# EAGLE board PCM2706C_TDA1543 (EAGLE 9.6.2)
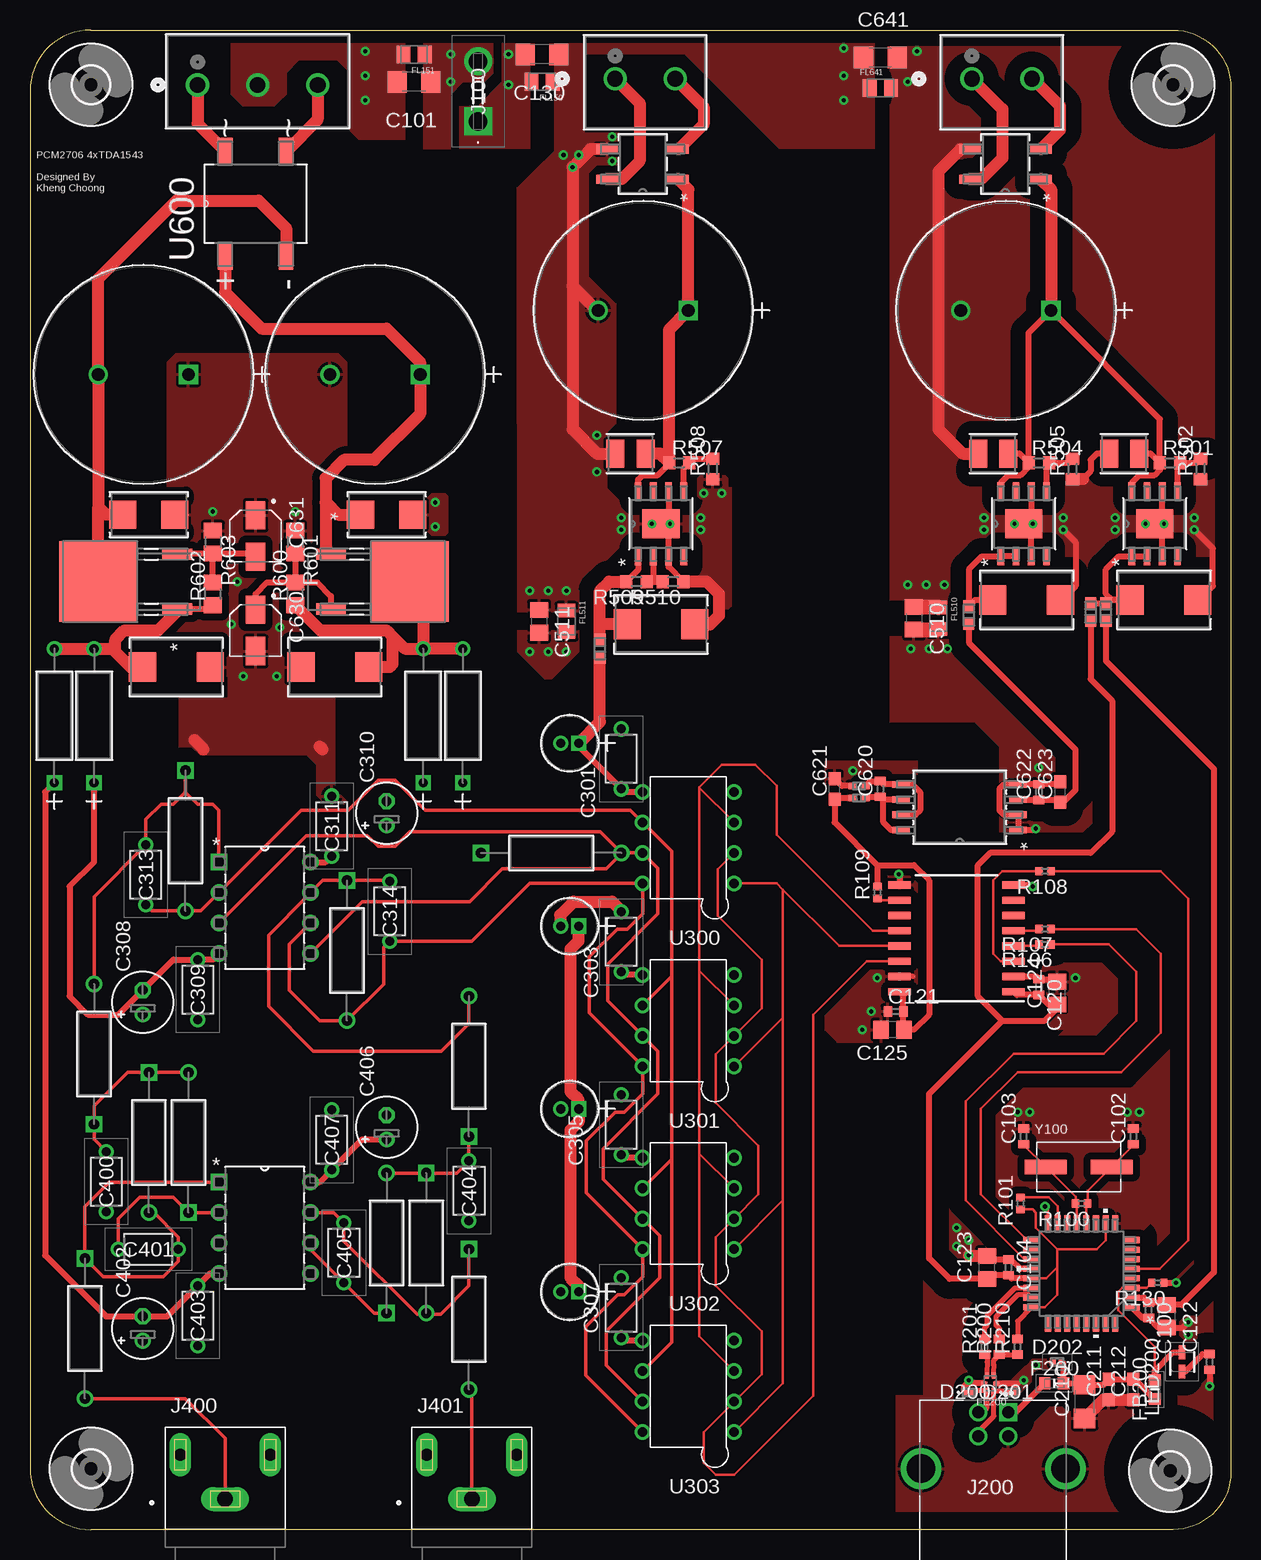
[diagram p0: board, top side]
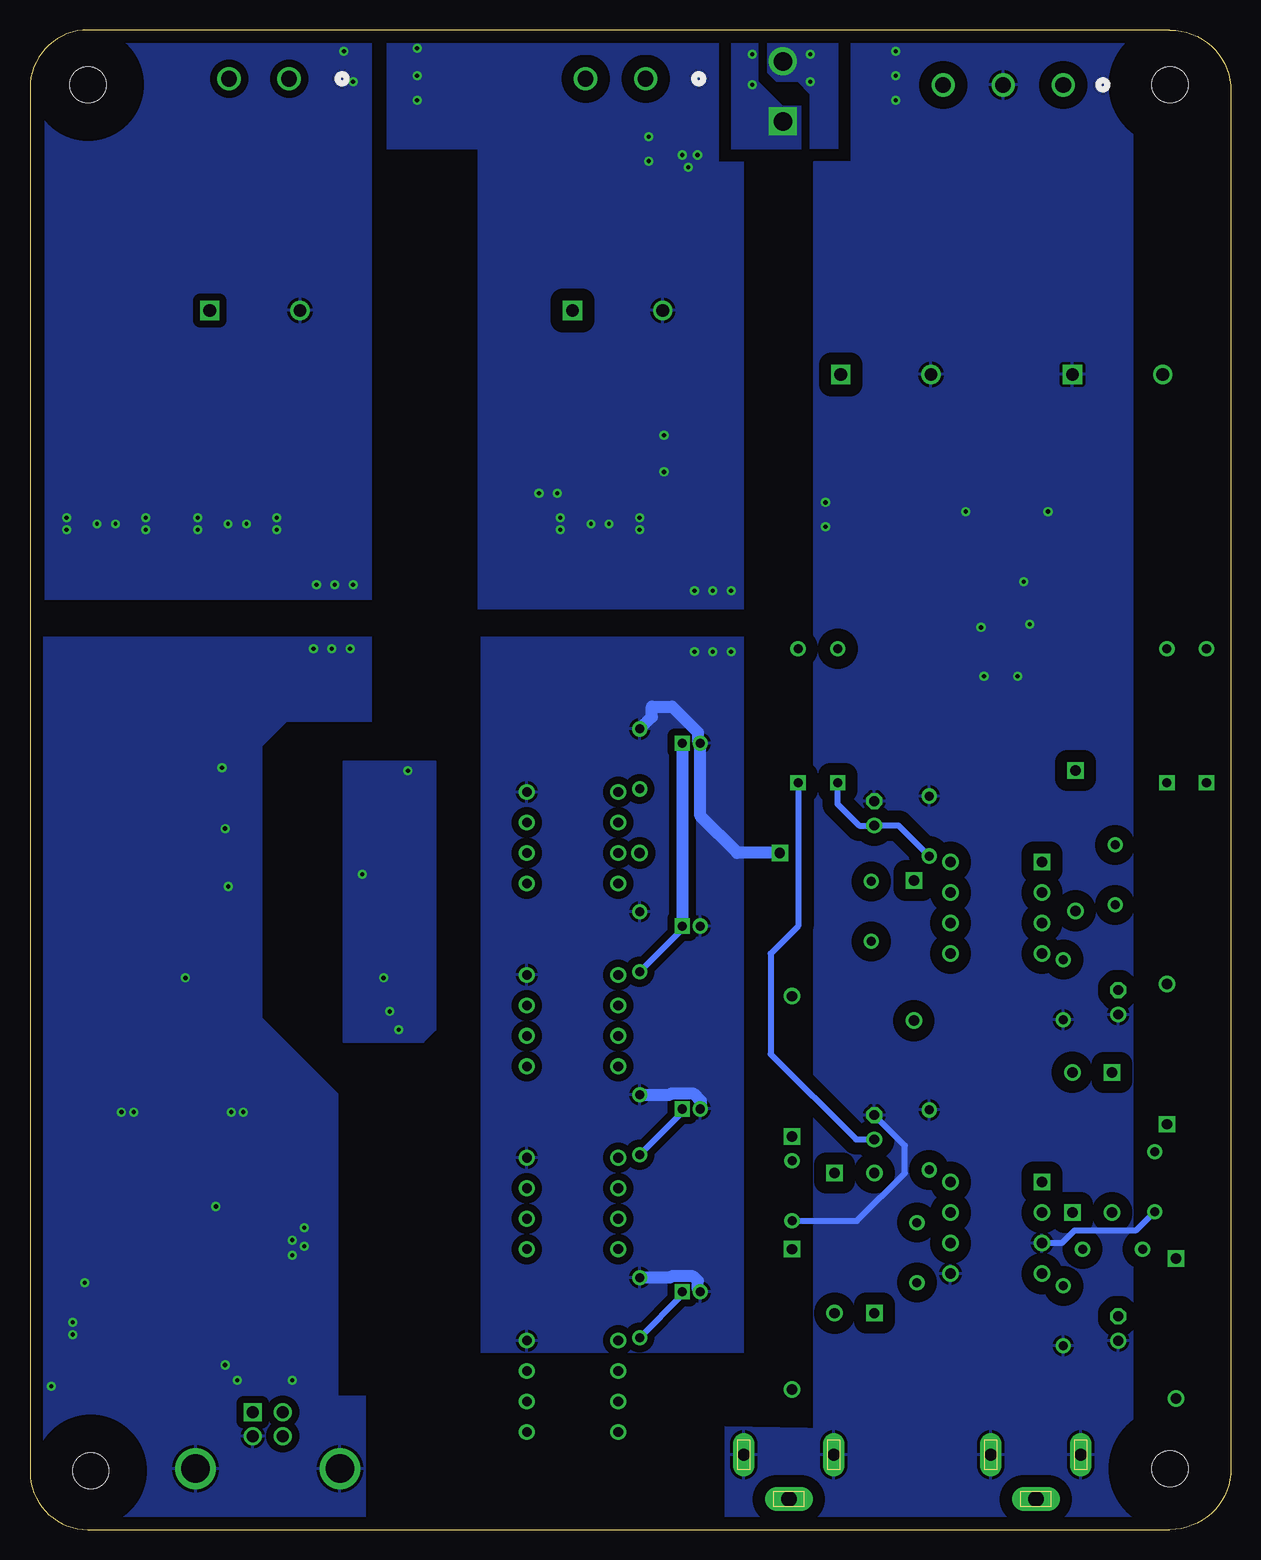
[diagram p1: board, bottom side, seen from below]

Size 100.08 x 124.97 mm. Coordinates in mm from the lower left corner, seen from the top.
Outline: 0,119.89 0,5.08 arc90 5.08,0 95.25,0 arc90 100.08,4.83 100.08,120.14 arc90 95.25,124.97 5.08,124.97 arc90 0,119.89
Copper layers (1*16): Top 0.035mm / dielectric 1.5mm / Bottom 0.035mm
Design rules "default *": minimum track width 6mil, minimum drill 0.35mm, track to track 6mil, track to pad 6mil, pad to pad 6mil, via to via 6mil, smd to smd 6mil, copper to edge 40mil, drill to drill 6mil, minimum pad ring 10mil, minimum via ring 8mil, stop-mask expansion 4mil, vias tented up to drill 13mil, thermal gap 10mil
Net classes: 1 Diff_Pair: width 0.406 mm; 2 Power: width 0.508 mm; 3 Digital: width 0.203 mm, clearance 0.61 mm; 4 Analog: width 0.305 mm, clearance 0.914 mm; 5 OPAMP power: width 0.762 mm

## Footprints (pad centres in the part's own frame; a part is rotated, then mirrored left to right if it is on the bottom)
C0402 = smd 0.7 x 0.9: 1 -0.65,0; 2 0.65,0
C1206 = smd 1.6 x 1.8: 1 -1.4,0; 2 1.4,0
C0805 = smd 1.3 x 1.5: 1 -0.95,0; 2 0.95,0
C0603 = smd 1.1 x 1: 1 -0.85,0; 2 0.85,0
CAP_PAN_4X7_PAN = drill 0.762 pad 1.27 square: 1 0,0 | drill 0.762 pad 1.27: 2 1.499,0
K104K15X7RF5TH5 = drill 0.75 pad 1.2: 1 0,0; 2 5,0
E2-5 = drill 0.813 pad 1.27: + -1.016,0 | drill 0.813 pad 1.27 octagon: - 1.016,0
PCAP_18X355_PAN = drill 1.067 pad 1.524 square: 1 0,0 | drill 1.067 pad 1.524: 2 7.518,0
CAP_293D-B_VSS = smd 1.498 x 2.311: 1 -1.258,0; 2 1.258,0
CAP_7343-43_TR3 = smd 2.261 x 2.489: 1 -2.819,0; 2 2.819,0
CAP_293D-C_VSS = smd 2.261 x 2.311: 1 -2.172,0; 2 2.172,0
CAPAE430X550N = smd 2.36 x 1.62: 1 -1.725,0; 2 1.725,0
X2DFN2_1.0X0.6_CASE_714AB_ISSU = smd 0.47 x 0.6: 1 -0.365,0; 2 0.365,0
ESD5581N2T5G = smd 0.47 x 0.6: 1 -0.365,0; 2 0.365,0
FUSC1608X75N = smd 0.95 x 1.02: 1 -0.785,0; 2 0.785,0
BEADC1608X100N = smd 0.95 x 1: 1 -0.8,0; 2 0.8,0
BEADC2012X105N = smd 1.14 x 1.47: 1 -0.89,0; 2 0.89,0
FIL_LCFE121002A350TG = smd 0.3 x 0.5: 1 -0.275,0.625; 2 0.275,0.625; 3 0.275,-0.625; 4 -0.275,-0.625 | smd 0.5 x 0.3: 5 -0.49,0; 6 0.49,0
3,0 = hole 3: 0,0
23765952 = drill 1.55 pad 2.325 square: 1 0,0 | drill 1.55 pad 2.325: 2 5,0
AMPHENOL_61729-1011BLF = drill 1 square: 1 1.25,4.71 | drill 1: 2 -1.25,4.71; 3 -1.25,2.71; 4 1.25,2.71 | drill 2.38: S1 -6.02,0; S2 6.02,0
SWITCHCRAFT_PJRAN1X1U01X = drill 1.3 pad 2 long: 1 0,0 | drill 1 pad 1.8 long: 2 -3.75,3.7; 3 3.75,3.7
CONN2_710002_WRE = drill 1.295 pad 1.803: 1 0,0; 2 5.004,0
CONN3_WR-TBL-1377_WRE = drill 1.295 pad 1.803: 1 0,0; 2 5.004,0; 3 10.008,0
IND_BLM18_0603_MUR = smd 0.965 x 0.94: 1 -0.749,0; 2 0.749,0
IND_BOURNS_78F = drill 0.762 pad 1.27 square: 1 0,0 | drill 0.762 pad 1.27: 2 11.176,0
IND_BLM15_0402_MUR = smd 0.711 x 0.559: 1 -0.521,0; 2 0.521,0
LEDM1620X150N = smd 1.15 x 0.55: 1 -0.8,0; 2 0.8,0
R0402 = smd 0.6 x 0.7: 1 -0.5,0; 2 0.5,0
R0402' = smd 0.7 x 0.9: 1 -0.65,0; 2 0.65,0
YAG_MF25_YAG = drill 0.864 pad 1.372 square: 1 0,0 | drill 0.864 pad 1.372: 2 11.684,0
R0603 = smd 1 x 1.1: 1 -0.85,0; 2 0.85,0
R0805 = smd 1.3 x 1.5: 1 -0.95,0; 2 0.95,0
PJT32_TEX = smd 1.346 x 0.508: 1 -4.178,2.8; 2 -4.178,2; 3 -4.178,1.2; 4 -4.178,0.4; 5 -4.178,-0.4; 6 -4.178,-1.2; 7 -4.178,-2; 8 -4.178,-2.8; 17 4.178,-2.8; 18 4.178,-2; 19 4.178,-1.2; 20 4.178,-0.4; 21 4.178,0.4; 22 4.178,1.2; 23 4.178,2; 24 4.178,2.8 | smd 0.508 x 1.346: 9 -2.8,-4.178; 10 -2,-4.178; 11 -1.2,-4.178; 12 -0.4,-4.178; 13 0.4,-4.178; 14 1.2,-4.178; 15 2,-4.178; 16 2.8,-4.178; 25 2.8,4.178; 26 2,4.178; 27 1.2,4.178; 28 0.4,4.178; 29 -0.4,4.178; 30 -1.2,4.178; 31 -2,4.178; 32 -2.8,4.178
DW0016B_N = smd 1.9 x 0.6: 1 -4.75,4.445; 2 -4.75,3.175; 3 -4.75,1.905; 4 -4.75,0.635; 5 -4.75,-0.635; 6 -4.75,-1.905; 7 -4.75,-3.175; 8 -4.75,-4.445; 9 4.75,-4.445; 10 4.75,-3.175; 11 4.75,-1.905; 12 4.75,-0.635; 13 4.75,0.635; 14 4.75,1.905; 15 4.75,3.175; 16 4.75,4.445
DIP-8(300MIL)(2.54MM) = drill 0.8: 1 -3.81,-3.81; 2 -1.27,-3.81; 3 1.27,-3.81; 4 3.81,-3.81; 5 3.81,3.81; 6 1.27,3.81; 7 -1.27,3.81; 8 -3.81,3.81
P8 = drill 0.864 pad 1.372 square: 1 -7.62,7.62 | drill 0.864 pad 1.372: 2 -7.62,5.08; 3 -7.62,2.54; 4 -7.62,0; 5 0,0; 6 0,2.54; 7 0,5.08; 8 0,7.62
TO-269AA_3P8X4P75_DIO = smd 1.803 x 0.762: 1 -2.959,1.25; 2 -2.959,-1.25; 3 2.959,-1.25; 4 2.959,1.25
RD_8_2_ADI = smd 1.46 x 0.559: 1 -2.724,1.905; 2 -2.724,0.635; 3 -2.724,-0.635; 4 -2.724,-1.905; 5 2.724,-1.905; 6 2.724,-0.635; 7 2.724,0.635; 8 2.724,1.905 | smd 2.413 x 3.099: EPAD 0,0
SOT508P985X260-4N = smd 2.235 x 1.245: 1 -4.394,2.54; 2 -4.394,-2.54; 3 4.394,-2.54; 4 4.394,2.54
KVU3 = smd 0.94 x 2.489: 1 -2.286,-6.413; 3 2.286,-6.413 | smd 6.706 x 6.528: 2 0,0.152
RI_8_1_ADI = smd 1.461 x 0.561: 1 -4.88,1.905; 2 -4.88,0.635; 3 -4.88,-0.635; 4 -4.88,-1.905; 5 4.88,-1.905; 6 4.88,-0.635; 7 4.88,0.635; 8 4.88,1.905
XTAL_ECS-120-20-3X-TR = smd 3.5 x 1.2: 1 -2.75,0; 2 2.75,0

## Placement (x,y rotation side)
C100  CC0402KRX7R8BB104  [C0402]  93.22,18.29 270 top
C101  [C1206]  32,120.65 180 top
C102  CC0402FRNPO8BN270  [C0402]  91.95,32.77 90 top
C103  CC0402FRNPO8BN270  [C0402]  82.8,32.77 90 top
C104  CC0402KRX7R8BB104  [C0402]  81.53,21.84 90 top
C120  CC0402KRX7R8BB104  [C0402]  84.07,45.21 270 top
C121  CC0402KRX7R8BB104  [C0402]  72.14,43.18 0 top
C122  10uF  [C0805]  94.74,17.78 270 top
C123  10uF  [C0805]  79.76,21.84 90 top
C124  10uF  [C0805]  85.6,44.7 90 top
C125  10uF  [C0805]  71.88,41.66 180 top
C130  [C1206]  42.67,122.94 180 top
C210  0.01uF  [C1206]  87.88,10.67 90 top
C211  0.1uF  [C0603]  89.92,11.68 90 top
C212  10uF  [C0603]  91.95,11.68 90 top
C300  EEAGA1C100H  [CAP_PAN_4X7_PAN]  45.72,35.05 180 top
C301  K104K15X7RF5TH5  [K104K15X7RF5TH5]  49.28,61.72 90 top
C302  EEAGA1C100H  [CAP_PAN_4X7_PAN]  45.72,50.29 180 top
C303  K104K15X7RF5TH5  [K104K15X7RF5TH5]  49.28,46.48 90 top
C304  EEAGA1C100H  [CAP_PAN_4X7_PAN]  45.72,65.53 180 top
C305  K104K15X7RF5TH5  [K104K15X7RF5TH5]  49.28,31.24 90 top
C306  EEAGA1C100H  [CAP_PAN_4X7_PAN]  45.72,19.81 180 top
C307  K104K15X7RF5TH5  [K104K15X7RF5TH5]  49.28,16 90 top
C308  860020572003  [E2-5]  9.4,43.94 90 top
C309  K104K15X7RF5TH5  [K104K15X7RF5TH5]  13.97,47.5 270 top
C310  860020572003  [E2-5]  29.72,59.69 90 top
C311  K104K15X7RF5TH5  [K104K15X7RF5TH5]  25.15,56.13 90 top
C313  K104K15X7RF5TH5  [K104K15X7RF5TH5]  9.65,52.07 90 top
C314  K104K15X7RF5TH5  [K104K15X7RF5TH5]  29.97,49.02 90 top
C400  K104K15X7RF5TH5  [K104K15X7RF5TH5]  6.35,31.5 270 top
C401  K104K15X7RF5TH5  [K104K15X7RF5TH5]  7.37,23.37 0 top
C402  860020572003  [E2-5]  9.4,16.76 90 top
C403  K104K15X7RF5TH5  [K104K15X7RF5TH5]  13.97,20.32 270 top
C404  K104K15X7RF5TH5  [K104K15X7RF5TH5]  36.58,30.73 270 top
C405  K104K15X7RF5TH5  [K104K15X7RF5TH5]  26.16,20.57 90 top
C406  860020572003  [E2-5]  29.72,33.53 90 top
C407  K104K15X7RF5TH5  [K104K15X7RF5TH5]  25.15,29.97 90 top
C500  ECA-1VM472  [PCAP_18X355_PAN]  85.09,101.6 180 top
C501  293D225X0035B2TE3  [CAP_293D-B_VSS]  91.19,89.66 180 top
C503  TR3E226K035C0200  [CAP_7343-43_TR3]  94.49,77.47 0 top
C504  293D225X0035B2TE3  [CAP_293D-B_VSS]  80.26,89.66 180 top
C505  TR3E226K035C0200  [CAP_7343-43_TR3]  83.06,77.47 0 top
C506  ECA-1VM472  [PCAP_18X355_PAN]  54.86,101.6 180 top
C507  293D225X0035B2TE3  [CAP_293D-B_VSS]  50.04,89.66 180 top
C508  TR3E226K035C0200  [CAP_7343-43_TR3]  52.58,75.44 0 top
C510  [C0805]  73.66,75.95 270 top
C511  [C0805]  42.42,75.69 270 top
C600  ECA-1HM332  [PCAP_18X355_PAN]  32.51,96.27 180 top
C601  ECA-1HM332  [PCAP_18X355_PAN]  13.21,96.27 180 top
C602  293D225X0050C2TE3  [CAP_293D-C_VSS]  29.72,84.58 0 top
C603  293D225X0050C2TE3  [CAP_293D-C_VSS]  9.91,84.58 180 top
C604  TR3E226K035C0200  [CAP_7343-43_TR3]  25.4,71.88 180 top
C605  TR3E226K035C0200  [CAP_7343-43_TR3]  12.19,71.88 180 top
C620  0.1uF  [C0402]  70.87,61.72 90 top
C621  10uF  [C0603]  67.06,61.72 90 top
C622  0.1uF  [C0402]  84.07,61.47 90 top
C623  10uF  [C0603]  85.85,61.47 90 top
C630  UWT1C100MCL1GB  [CAPAE430X550N]  18.8,74.93 270 top
C631  UWT1C100MCL1GB  [CAPAE430X550N]  18.8,82.8 270 top
C641  [C1206]  70.87,122.68 0 top
D200  ESDM3551N2T5G  [X2DFN2_1.0X0.6_CASE_714AB_ISSU]  78.23,11.43 0 top
D201  ESDM3551N2T5G  [X2DFN2_1.0X0.6_CASE_714AB_ISSU]  81.79,11.43 0 top
D202  ESD5581N2T5G  [ESD5581N2T5G]  85.6,13.97 180 top
F200  0603L100SLYR  [FUSC1608X75N]  85.34,12.19 0 top
FB200  742792651  [BEADC1608X100N]  93.73,11.68 90 top
FL150  BLM21PG121SN1D  [BEADC2012X105N]  42.67,120.65 180 top
FL151  BLM21PG121SN1D  [BEADC2012X105N]  32,122.94 180 top
FL200  LCFE121002A350TG  [FIL_LCFE121002A350TG]  80.01,12.19 180 top
FL510  BLM21PG121SN1D  [BEADC2012X105N]  75.69,75.95 270 top
FL511  BLM21PG121SN1D  [BEADC2012X105N]  44.7,75.69 270 top
FL641  BLM21PG121SN1D  [BEADC2012X105N]  70.87,120.14 0 top
H100  MOUNT-HOLE3.0  [3,0]  95.02,4.9 0 top
H101  MOUNT-HOLE3.0  [3,0]  5.08,5.08 0 top
H102  MOUNT-HOLE3.0  [3,0]  95.25,120.4 0 top
H103  MOUNT-HOLE3.0  [3,0]  5.08,120.4 0 top
J100  2376595-2  [23765952]  37.34,117.35 90 top
J200  61729-1011BLF  [AMPHENOL_61729-1011BLF]  80.26,5.08 0 top
J400  PJRAN1X1U01X  [SWITCHCRAFT_PJRAN1X1U01X]  16.26,2.54 0 top
J401  PJRAN1X1U01X  [SWITCHCRAFT_PJRAN1X1U01X]  36.83,2.54 0 top
J500  691137710002  [CONN2_710002_WRE]  78.49,120.9 0 top
J501  691137710002  [CONN2_710002_WRE]  48.77,120.9 0 top
J600  691137710003  [CONN3_WR-TBL-1377_WRE]  13.97,120.4 0 top
L500  BLM18PG121SN1D  [IND_BLM18_0603_MUR]  88.39,76.45 90 top
L501  BLM18PG121SN1D  [IND_BLM18_0603_MUR]  78.23,76.2 90 top
L502  BLM18PG121SN1D  [IND_BLM18_0603_MUR]  47.5,73.41 90 top
L504  BLM18PG121SN1D  [IND_BLM18_0603_MUR]  89.66,76.45 90 top
L600  78F1R0K-RC  [IND_BOURNS_78F]  36.07,62.23 90 top
L601  78F1R0K-RC  [IND_BOURNS_78F]  32.77,62.23 90 top
L602  BLM15HD182SN1D  [IND_BLM15_0402_MUR]  69.09,60.96 180 top
L603  BLM15HD182SN1D  [IND_BLM15_0402_MUR]  69.09,61.98 180 top
L605  78F1R0K-RC  [IND_BOURNS_78F]  2.03,62.23 90 top
L606  78F1R0K-RC  [IND_BOURNS_78F]  5.33,62.23 90 top
LED200  SML-D12P8WT86C  [LEDM1620X150N]  96.01,13.97 90 top
R100  1M  [R0402]  87.63,27.18 180 top
R101  1k5  [R0402]  82.55,27.18 90 top
R106  33R  [R0402]  84.58,48.77 180 top
R107  33R  [R0402]  84.58,50.04 180 top
R108  33R  [R0402]  84.58,54.86 180 top
R109  1K  [R0402]  70.61,53.09 90 top
R130  1M  [R0402]  93.98,20.57 180 top
R200  27R  [R0402']  80.77,15.24 90 top
R201  27R  [R0402']  79.55,15.24 90 top
R210  1K5  [R0402']  82.3,15.24 90 top
R211  300R  [R0402']  98.3,13.97 90 top
R301  MFP-25BRD52-10K  [YAG_MF25_YAG]  37.59,56.39 0 top
R302  MFP-25BRD52-10K  [YAG_MF25_YAG]  12.95,63.25 270 top
R303  MFP-25BRD52-10K  [YAG_MF25_YAG]  26.42,54.1 270 top
R400  MFP-25BRD52-10K  [YAG_MF25_YAG]  5.33,33.78 90 top
R401  MFP-25BRD52-10K  [YAG_MF25_YAG]  13.21,26.42 90 top
R402  MFP-25BRD52-10K  [YAG_MF25_YAG]  9.91,38.1 270 top
R403  MFP-25BRD52-10K  [YAG_MF25_YAG]  4.57,22.61 270 top
R404  MFP-25BRD52-10K  [YAG_MF25_YAG]  36.58,32.77 90 top
R405  MFP-25BRD52-10K  [YAG_MF25_YAG]  29.72,18.03 90 top
R406  MFP-25BRD52-10K  [YAG_MF25_YAG]  33.02,29.72 270 top
R407  MFP-25BRD52-10K  [YAG_MF25_YAG]  36.58,23.37 270 top
R501  100k  [R0603]  95,88.9 0 top
R502  100k  [R0603]  97.54,88.39 90 top
R504  100k  [R0603]  84.07,88.9 0 top
R505  100k  [R0603]  86.87,88.39 90 top
R507  100k  [R0603]  54.1,88.9 0 top
R508  100k  [R0603]  56.9,88.39 90 top
R509  100k  [R0603]  50.55,78.99 180 top
R510  100k  [R0603]  53.59,78.99 180 top
R600  RC0805FR-07240RL  [R0805]  22.1,77.98 90 top
R601  RC0805FR-072K05L  [R0805]  22.1,82.3 270 top
R602  RC0805FR-07120RL  [R0805]  15.24,77.98 90 top
R603  RC0805FR-071K02L  [R0805]  15.24,82.3 270 top
U100  PCM2706CPJT  [PJT32_TEX]  87.63,21.34 180 top
U101  ISO7740FDWR  [DW0016B_N]  77.22,49.28 180 top
U300  TDA1543  [DIP-8(300MIL)(2.54MM)]  54.86,57.66 90 top
U301  TDA1543  [DIP-8(300MIL)(2.54MM)]  54.86,42.42 90 top
U302  TDA1543  [DIP-8(300MIL)(2.54MM)]  54.86,27.18 90 top
U303  TDA1543  [DIP-8(300MIL)(2.54MM)]  54.86,11.94 90 top
U304  NE5532P  [P8]  23.37,48.01 0 top
U400  NE5532P  [P8]  23.37,21.34 0 top
U500  MB10S-13  [TO-269AA_3P8X4P75_DIO]  81.28,113.79 180 top
U501  ADP7104ARDZ-3.3-R7  [RD_8_2_ADI]  93.73,83.82 90 top
U502  ADP7104ARDZ-5.0-R7  [RD_8_2_ADI]  82.8,83.82 90 top
U503  MB10S-13  [TO-269AA_3P8X4P75_DIO]  51.05,113.79 180 top
U504  ADP7104ARDZ-R7  [RD_8_2_ADI]  52.58,83.82 90 top
U600  DF04S  [SOT508P985X260-4N]  18.8,110.49 90 top
U601  LM317MKVURG3  [KVU3]  31.5,78.99 270 top
U602  LM337KVURG3  [KVU3]  5.84,78.99 90 top
U603  ADUM6028-5BRIZ  [RI_8_1_ADI]  77.47,60.2 180 top
Y100  ECS-120-20-3X-TR  [XTAL_ECS-120-20-3X-TR]  87.38,30.23 0 top

## Library data of the parts
C100-C104 C120-C125 C130 C210-C212 C308 C310 C402 C406 C510 C511 C620-C623 C641 = rcl; SPICEPREFIX: C
C300 C302 C304 C306 = EEAGA1C100H; COPYRIGHT: Copyright (C) 2024 Ultra Librarian. All rights reserved.; MANUFACTURER_PART_NUMBER: EEAGA1C100H; MFR_NAME: Panasonic
C301 C303 C305 C307 C309 C311 C313 C314 C400 C401 C403-C405 C407 = K104K15X7RF5TH5; DESCRIPTION: Vishay K104K15X7RF5TH5 100nF Multilayer Ceramic Capacitor MLCC 50V dc +/-10% Tolerance Through Hole; HEIGHT: 6.6mm; MANUFACTURER_NAME: Vishay; MANUFACTURER_PART_NUMBER: K104K15X7RF5TH5; MOUSER_PART_NUMBER: 594-K104K15X7RF5TH5; MOUSER_PRICE-STOCK: https://www.mouser.co.uk/ProductDetail/Vishay-BC-Components/K104K15X7RF5TH5?qs=CuWZN%2F5Vbiofhf%252BuZNGw%2Fg%3D%3D
C500 C506 = ECA_1VM472; COPYRIGHT: Copyright (C) 2024 Ultra Librarian. All rights reserved.; MANUFACTURER_PART_NUMBER: ECA-1VM472; MFR_NAME: Panasonic
C501 C504 C507 = 293D225X0035B2TE3; COPYRIGHT: Copyright (C) 2024 Ultra Librarian. All rights reserved.; MANUFACTURER_PART_NUMBER: 293D225X0035B2TE3; MFR_NAME: Vishay
C503 C505 C508 C604 C605 = TR3E226K035C0200; COPYRIGHT: Copyright (C) 2024 Ultra Librarian. All rights reserved.; MANUFACTURER_PART_NUMBER: TR3E226K035C0200; MFR_NAME: Vishay
C600 C601 = ECA_1HM332; COPYRIGHT: Copyright (C) 2024 Ultra Librarian. All rights reserved.; MANUFACTURER_PART_NUMBER: ECA-1HM332; MFR_NAME: Panasonic
C602 C603 = 293D225X0050C2TE3; COPYRIGHT: Copyright (C) 2024 Ultra Librarian. All rights reserved.; MANUFACTURER_PART_NUMBER: 293D225X0050C2TE3; MFR_NAME: Vishay
C630 C631 = UWT1C100MCL1GB; MANUFACTURER: Nichicon; MAXIMUM_PACKAGE_HEIGHT: 5.50 mm; PARTREV: CAT.8100L; STANDARD: IPC 7351B
D200 D201 = ESDM3551N2T5G; DESCRIPTION: ESD Protection Diode, CC and SBU Protection (5.5 V USB 3.x), 21 pF; HEIGHT: mm; MANUFACTURER_NAME: ON Semiconductor; MANUFACTURER_PART_NUMBER: ESDM3551N2T5G; MOUSER_PART_NUMBER: 863-ESDM3551N2T5G; MOUSER_PRICE-STOCK: https://www.mouser.com/Search/Refine.aspx?Keyword=863-ESDM3551N2T5G
D202 = ESD5581N2T5G; DESCRIPTION: BIDIRECTIONAL 5V MID-CAP; HEIGHT: 0.4mm; MANUFACTURER_NAME: ON Semiconductor; MANUFACTURER_PART_NUMBER: ESD5581N2T5G; MOUSER_PART_NUMBER: 863-ESD5581N2T5G; MOUSER_PRICE-STOCK: https://www.mouser.com/Search/Refine.aspx?Keyword=863-ESD5581N2T5G; SPICEPREFIX: D
F200 = 0603L100SLYR; DESCRIPTION: PTC 6V POLYFUSE SURF MOUNT 0603 SL 1.00A; HEIGHT: 0.75mm; MANUFACTURER_NAME: LITTELFUSE; MANUFACTURER_PART_NUMBER: 0603L100SLYR; MOUSER_PART_NUMBER: 576-0603L100SLYR; MOUSER_PRICE-STOCK: https://www.mouser.com/Search/Refine.aspx?Keyword=576-0603L100SLYR
FB200 = 742792651; DESCRIPTION: WE-CBF Ferrite Bead 0603 600Ohm 1000mA WE-CBF Ferrite Bead 0603 600Ohm 1000mA; HEIGHT: 1mm; MANUFACTURER_NAME: Wurth Elektronik; MANUFACTURER_PART_NUMBER: 742792651; MOUSER_PART_NUMBER: 710-742792651; MOUSER_PRICE-STOCK: https://www.mouser.com/Search/Refine.aspx?Keyword=710-742792651
FL150 FL151 FL510 FL511 FL641 = BLM21PG121SN1D
FL200 = LCFE121002A350TG; MANUFACTURER: Littelfuse; MAXIMUM_PACKAGE_HEIGHT: 0.65 mm; PARTREV: 03/01/18; STANDARD: Manufacturer Recommendations
H100-H103 = holes
J100 = 2376595-2; ARROW_PART_NUMBER: 2376595-2; ARROW_PRICE-STOCK: https://www.arrow.com/en/products/2376595-2/te-connectivity?region=nac; DESCRIPTION: Contact Features: Contact Mating Area Plating Material Thickness 4 MICM | Terminal Orientation Straight | Contact Underplating Material Thickness 1.3 MICM | PCB Contact Termination Area Plating Material Thickness 4 MICM | Mating Tab Thickness .8 MM | Contact Underplating Material Nickel | Contact Mating Area Plating Material Thickness 157.48 MICIN | Mating Tab Width 6.35 MM | Terminal Size 6.35 | Mating Tab Thickness .032 INCH | Mating Tab Width .25 INCH | PCB Terminal Type Tab | Terminal Plating Material T; HEIGHT: 10.65mm; MANUFACTURER_NAME: TE Connectivity; MANUFACTURER_PART_NUMBER: 2376595-2; MOUSER_PART_NUMBER: 571-2376595-2; MOUSER_PRICE-STOCK: https://www.mouser.co.uk/ProductDetail/TE-Connectivity/2376595-2?qs=A6eO%252BMLsxmTtAfwrSC%2FSrg%3D%3D
J200 = 61729-1011BLF; MANUFACTURER: Amphenol; MAXIMUM_PACKAGE_HEIGHT: 11.5 mm; PARTREV: AB; STANDARD: Manufacturer Recommendations
J400 J401 = PJRAN1X1U01X; MANUFACTURER: Switchcraft; MAXIMUM_PACKAGE_HIEGHT: 13mm; PARTREV: A; STANDARD: Manufacturer Recommendations
J500 J501 = 691137710002; COPYRIGHT: Copyright (C) 2024 Ultra Librarian. All rights reserved.; MANUFACTURER_PART_NUMBER: 691137710002; MFR_NAME: Wurth Electronics
J600 = 691137710003; COPYRIGHT: Copyright (C) 2024 Ultra Librarian. All rights reserved.; MANUFACTURER_PART_NUMBER: 691137710003; MFR_NAME: Wurth Electronics; TYPE: Wire to Board
L500-L502 L504 = BLM18PG121SN1D; COPYRIGHT: Copyright (C) 2024 Ultra Librarian. All rights reserved.; MANUFACTURER_PART_NUMBER: BLM18PG121SN1D; MFR_NAME: Murata
L600 L601 L605 L606 = 78F1R0K_RC; COPYRIGHT: Copyright (C) 2024 Ultra Librarian. All rights reserved.; MANUFACTURER_PART_NUMBER: 78F1R0K-RC; MFR_NAME: Bourns Electronics
L602 L603 = BLM15HD182SN1D; COPYRIGHT: Copyright (C) 2024 Ultra Librarian. All rights reserved.; MANUFACTURER_PART_NUMBER: BLM15HD182SN1D; MFR_NAME: Murata
LED200 = SML-D12P8WT86C; DESCRIPTION: ROHM - SML-D12P8WT86C - LED, AEC-Q101, GREEN, 6.3MCD, SMD, 0603; HEIGHT: 1.5mm; MANUFACTURER_NAME: ROHM Semiconductor; MANUFACTURER_PART_NUMBER: SML-D12P8WT86C; MOUSER_PART_NUMBER: 755-SML-D12P8WT86C; MOUSER_PRICE-STOCK: https://www.mouser.com/Search/Refine.aspx?Keyword=755-SML-D12P8WT86C
R100 R101 R106-R109 R130 R501 R502 R504 R505 R507-R510 R600-R603 = rcl; SPICEPREFIX: R
R200 R201 R210 R211 = rcl
R301-R303 R400-R407 = MFP_25BRD52_10K; COPYRIGHT: Copyright (C) 2024 Ultra Librarian. All rights reserved.; MANUFACTURER_PART_NUMBER: MFP-25BRD52-10K; MFR_NAME: Yageo
U100 = PCM2706CPJT; COPYRIGHT: Copyright (C) 2024 Ultra Librarian. All rights reserved.; MANUFACTURER_PART_NUMBER: PCM2706CPJT; MFR_NAME: Texas Instruments
U101 = ISO7740FDWR; COPYRIGHT: Copyright (C) 2024 Ultra Librarian. All rights reserved.; MANUFACTURER_PART_NUMBER: ISO7740FDWR; MFR_NAME: Texas Instruments; REFDES: RefDes; TYPE: TYPE
U300-U303 = TDA1543; AVAILABILITY: In Stock; CHECK_PRICES: https://www.snapeda.com/parts/TDA1543/NXP+Semiconductors/view-part/?ref=eda; DESCRIPTION: Dual 16-bit DAC economy version I2S input format; MF: NXP; MP: TDA1543; PACKAGE: None; PRICE: None; SNAPEDA_LINK: https://www.snapeda.com/parts/TDA1543/NXP+Semiconductors/view-part/?ref=snap
U304 U400 = NE5532P; COPYRIGHT: Copyright (C) 2024 Ultra Librarian. All rights reserved.; MANUFACTURER_PART_NUMBER: NE5532P; MFR_NAME: Texas Instruments
U500 U503 = MB10S_13; COPYRIGHT: Copyright (C) 2024 Ultra Librarian. All rights reserved.; MANUFACTURER_PART_NUMBER: MB10S-13; MFR_NAME: Diodes Inc
U501 = ADP7104ARDZ_3_3_R7; COPYRIGHT: Copyright (C) 2024 Ultra Librarian. All rights reserved.; MANUFACTURER_PART_NUMBER: ADP7104ARDZ-3.3-R7; MFR_NAME: Analog Devices Inc
U502 = ADP7104ARDZ_5_0_R7; COPYRIGHT: Copyright (C) 2024 Ultra Librarian. All rights reserved.; MANUFACTURER_PART_NUMBER: ADP7104ARDZ-5.0-R7; MFR_NAME: Analog Devices Inc
U504 = ADP7104ARDZ_R7; COPYRIGHT: Copyright (C) 2024 Ultra Librarian. All rights reserved.; MANUFACTURER_PART_NUMBER: ADP7104ARDZ-R7; MFR_NAME: Analog Devices Inc
U600 = DF04S; MPN: DF04S; OC_FARNELL: 1467469; OC_NEWARK: 18C6124; PACKAGE: SDIP-4; SUPPLIER: Fairchild
U601 = LM317MKVURG3; COPYRIGHT: Copyright (C) 2024 Ultra Librarian. All rights reserved.; MANUFACTURER_PART_NUMBER: LM317MKVURG3; MFR_NAME: Texas Instruments
U602 = LM337KVURG3; COPYRIGHT: Copyright (C) 2024 Ultra Librarian. All rights reserved.; MANUFACTURER_PART_NUMBER: LM337KVURG3; MFR_NAME: Texas Instruments
U603 = ADUM6028; COPYRIGHT: Copyright (C) 2024 Ultra Librarian. All rights reserved.; MANUFACTURER_PART_NUMBER: ADUM6028-5BRIZ; MFR_NAME: Analog Devices Inc
Y100 = ECS-120-20-3X-TR; MANUFACTURER: ECS INC.; PARTREV: 2017; STANDARD: Manufacturer recommendations

## Nets
3V3: C503.1 L500.2 L504.2 U501.1 U501.2
5V_ISO [Power]: C121.2 C125.1 C621.1 L602.2 R109.2 U101.16
+12: C604.1 L600.2 L601.2 R600.1 U601.2
-12: C605.2 L605.2 L606.2 R602.1 U602.1
AGND: C101.2 C308.+ C309.2 C310.- C311.2 C400.2 C402.+ C403.2 C404.2 C406.- C407.2 C600.2 C601.1 C602.2 C603.1 C604.2 C605.1 C630.2 C631.1 FL151.2 J400.2 J400.3 J401.2 J401.3 J600.2 R601.1 R603.1 U400.3 U400.5
AGNDL: U100.26
AGNDR: U100.31
AOL [Analog]: C313.1 R302.2 U300.6 U301.6 U302.6 U303.6 U304.2
AOR [Analog]: C314.1 R303.2 U300.8 U301.8 U302.8 U303.8 U304.6
BCK [Digital]: R106.1 U100.19
BCK_OUT_ISO [Digital]: U101.13 U300.1 U301.1 U302.1 U303.1
DAC: C508.1 L502.2 R509.2 U504.1
DGND_P: C500.2 C501.2 C503.2 C504.2 C505.2 C510.1 C641.2 FL510.1 FL641.2 R502.1 R505.1 U500.3 U501.3 U501.6 U501.EPAD U502.3 U502.6 U502.EPAD
DGND_S: C100.2 C102.2 C103.2 C104.2 C120.1 C122.2 C123.2 C124.2 C210.1 C211.1 C212.1 C510.2 C622.2 C623.2 D200.1 D201.2 D202.2 FL200.5 FL200.6 FL510.2 J200.4 J200.S1 J200.S2 R130.1 R211.1 U100.1 U100.9 U100.16 U100.20 U101.2 U101.8 U603.1 U603.2 U603.4
DOUT [Digital]: R107.1 U100.17
DOUT_OUT_ISO [Digital]: U101.12 U300.3 U301.3 U302.3 U303.3
GND_DAC_P: C130.1 C506.2 C507.2 C508.2 C511.1 C641.1 FL150.1 FL511.1 FL641.1 R508.1 R510.1 U503.3 U504.3 U504.6 U504.EPAD
GND_DAC_S: C300.2 C301.2 C302.2 C303.2 C304.2 C305.2 C306.2 C307.2 C511.2 FL511.2 R301.1 U300.4 U301.4 U302.4 U303.4
GND_ISO: C121.1 C125.2 C621.2 L603.2 U101.9 U101.15
LEFT_FIL: C401.2 R402.2 R403.1 U400.1
LEFT_OUT: C313.2 R302.1 R400.2 U304.1
LRCK [Digital]: R108.1 U100.5
LRCK_OUT_ISO [Digital]: U101.14 U300.2 U301.2 U302.2 U303.2
N$1 [Digital]: R108.2 U101.3
N$2: LED200.1 R211.2
N$3 [Digital]: R106.2 U101.4
N$4: R109.1 U101.10
N$5: C103.1 R100.2 U100.13 Y100.1
N$6: C102.1 R100.1 U100.12 Y100.2
N$7: J600.1 U600.4
N$8 [Power]: C210.2 C211.2 C212.2 D202.1 F200.2 FB200.1
N$9: C401.1 R401.1 U400.2
N$10 [Digital]: R107.2 U101.5
N$11: C405.1 R405.1 U400.6
N$12: C620.1 L602.1 U603.6 U603.8
N$13: C400.1 R400.1 R401.2 R402.1
N$14: J600.3 U600.3
N$15: J400.1 R403.2
N$16: R101.2 U100.15
N$17: C404.1 R404.1 R405.2 R406.1
N$18: J401.1 R407.2
N$19: J500.2 U500.2
N$20: J500.1 U500.4
N$21: C500.1 C501.1 C504.1 R501.1 R504.1 U500.1 U501.8 U502.8
N$22: C620.2 L603.1 U603.5 U603.7
N$23: J501.2 U503.2
N$24: R501.2 R502.2 U501.5
N$25: C505.1 L501.2 U502.1 U502.2
N$26: R504.2 R505.2 U502.5
N$27: J501.1 U503.4
N$28: C506.1 C507.1 R507.1 U503.1 U504.8
N$29: U504.7
N$30: R507.2 R508.2 U504.5
N$31: R509.1 R510.2 U504.2
N$32: C600.1 C602.1 U600.1 U601.1
N$33: U502.7
N$34: U501.7
N$35: C630.1 R600.2 R601.2 U601.3
N$36: C601.2 C603.2 U600.2 U602.2
N$37: C101.1 FL151.1 J100.2
N$38: C130.2 FL150.2 J100.1
N$39: C631.2 R602.2 R603.2 U602.3
RIGHT_FIL: C405.2 R406.2 R407.1 U400.7
RIGHT_OUT: C314.2 R303.1 R404.2 U304.7
USB2_N [Diff_Pair]: FL200.3 R201.1
USB2_P [Diff_Pair]: FL200.4 R200.1 R210.1
USB3_N [Diff_Pair]: R201.2 U100.22
USB3_P [Diff_Pair]: R200.2 U100.23
USB_N [Diff_Pair]: D200.2 FL200.2 J200.2
USB_P [Diff_Pair]: D201.1 FL200.1 J200.3
VBUS [Digital]: FB200.2 LED200.2 R130.2 U100.3
VCC_5V [Power]: F200.1 J200.1
VCCL: U100.27
VCCR: U100.30
VCOM: U100.32
VDD+12_FIL: C406.+ C407.1 L600.1 U400.8
VDD+12_IV: C310.+ C311.1 L601.1 U304.8
VDD-12_FIL: C402.- C403.1 L605.1 U400.4
VDD-12_IV: C308.- C309.1 L606.1 U304.4
VDD_3V3 [Digital]: C104.1 C120.2 C123.1 C124.1 L500.1 R101.1 R210.2 U100.10 U100.21 U100.24 U101.1
VDD_3V3_1 [Digital]: C100.1 C122.1 L504.1 U100.2
VDD_5V_ISO: C622.1 C623.1 L501.1 U603.3
VDD_DAC: C300.1 C301.1 C302.1 C303.1 C304.1 C305.1 C306.1 C307.1 L502.1 U300.5 U301.5 U302.5 U303.5
VREF [Analog]: R301.2 U300.7 U301.7 U302.7 U303.7 U304.3 U304.5
ZGND: U100.25

## Tracks (layer width: path | path; a pad name or v marks a point on that pad's centre or on a via)
3V3
  Top 0.508: U501.2 U501.1 90.75,81.1 89.66,80.01 89.66,77.98 90.17,77.47 C503.1 89.93,77.47 L504.2 L500.2
5V_ISO
  Top 0.508: L602.2 67.14,60.96 C621.1 67.06,58.93 70.61,55.37 | 70.61,55.37 73.66,55.37 74.93,54.1 74.93,42.93 73.66,41.66 C125.1 72.79,41.7 C121.2 72.79,44.51 U101.16 | 70.61,55.37 R109.2
+12
  Top 1.016: R600.1 24.2,74.93 29.72,74.93 30.23,74.42 | L600.2 L601.2 | C604.1 29.97,71.88 30.23,72.14 30.23,74.42 | 30.23,74.42 31.24,73.41 L601.2 | U601.2 32.77,77.88 L601.2
-12
  Top 0.508: R602.1 14.92,76.71 U602.1
  Top 1.016: L605.2 L606.2 6.86,73.41 7.11,73.15 | C605.2 8.38,71.88 7.11,73.15 | 7.11,73.15 7.11,74.17 7.87,74.93 10.67,74.93 12.26,76.52 U602.1
AGND  (via drill 0.35)
  Top 1.016: 13.72,65.79 14.48,65.02 | 24.13,65.28 24.38,65.02
  Bottom 0.508: U400.3 14.08,23.88 13.05,24.91 7.93,24.91 C400.2 | C404.2 31.16,25.73 27.18,29.72 27.18,32 C406.-
  other vias: 33.78,85.6 33.78,83.57 27.94,123.19 27.94,121.16 27.94,119.13 15.24,84.84 22.1,84.84 17.78,71.12 20.57,71.12 20.83,75.18 16.76,75.44 17.27,78.99
  pour Bottom (isolate 1.016, rank 2): 8.13,124.71 34.8,124.71 34.8,0 8.13,0
  pour Bottom (isolate 1.016): 42.16,8.59 42.16,0 30.73,0 30.73,8.38
  pour Top (isolate 0.61): 12.19,98.04 25.65,98.04 26.42,97.28 26.42,70.61 25.65,69.85 11.94,69.85 11.43,70.36 11.43,97.28
  pour Top: 32.77,85.85 33.02,85.85 33.53,86.36 33.78,86.36 34.54,86.36 34.8,86.11 34.8,83.06 34.54,82.8 33.53,82.8 33.02,83.31 32.77,83.31
  pour Top: 21.59,71.63 21.59,69.34 25.4,69.34 25.4,61.72 26.42,60.71 26.16,60.45 24.64,60.45 23.88,61.21 23.88,63.75 23.11,64.52 14.22,64.52 13.53,65.21 12.45,65.21 12.45,69.34 16.51,69.34 16.51,71.63
  pour Top (no thermals): 31.24,123.95 31.24,115.82 27.43,115.82 26.67,116.59 26.67,121.41 25.65,122.43 22.61,122.43 22.35,122.43 21.34,121.41 21.34,119.63 20.57,118.87 20.32,118.62 17.78,118.62 16.76,119.63 16.76,123.95
AOL
  Top 0.305: 53.47,46.1 U301.6 | 53.47,46.1 53.47,56.52 U300.6 50.04,59.94 32.92,59.94 30.43,62.43 29,62.43 26.51,59.94 22.61,59.94 U304.2 14.22,51.56 R302.2 10.16,51.56 C313.1 | 53.47,46.1 53.47,30.86 | U302.6 53.47,30.86 | 53.47,30.86 53.47,15.62 U303.6
AOR
  Top 0.305: U303.8 46.3,12.88 46.3,16.9 48.96,19.56 49.53,19.56 51.05,21.08 U302.8 46.35,28.07 46.35,32.38 48.77,34.8 49.53,34.8 51.05,36.32 U301.8 46.61,43.05 46.61,47.73 48.92,50.04 49.78,50.04 51.05,51.31 U300.8 41.66,53.85 36.83,49.02 C314.1 29.46,48.51 29.46,45.47 R303.2 24.13,42.42 21.61,44.93 21.61,48.79 U304.6
BCK
  Top 0.203: U100.19 82.87,22.54 77.98,27.43 77.98,35.69 81.96,39.67 89.46,39.67 92.2,42.42 92.2,46.48 89.92,48.77 R106.1
BCK_OUT_ISO
  Top 0.203: U101.13 67.44,48.64 62.74,53.34 | 62.74,42.67 62.74,53.34 | U301.1 62.74,42.67 | 62.74,42.67 62.74,27.43 | 62.74,27.43 U302.1 | 62.74,27.43 62.74,12.19 U303.1 | U300.1 62.23,53.85 62.74,53.34
DAC
  Top 0.508: U504.1 50.67,79.97 R509.2
  Top 1.016: L502.2 47.5,75.69 | 47.5,75.69 47.5,78.23 48.26,78.99 R509.2 | C508.1 47.75,75.44 47.5,75.69
DGND_P  (via drill 0.3, 0.35)
  Top 0.508: U501.EPAD 94.36,84.45 U501.6 | U501.3 94.36,83.69 v94.49,83.82 | C503.2 98.27,78.44 98.37,78.44 98.56,78.63 98.56,81.78 v97.03,83.31 | U502.6 83.44,84.96 83.82,84.58 | U502.3 83.44,83.69 v83.57,83.82 | v86.11,83.31 87.14,82.28 87.14,78.63 86.36,77.85 86.36,77.22 86.13,77.22 C505.2 | C501.2 88.9,89.66 88.39,89.15 88.39,88.2 87.73,87.54
  Top 1.016: 77.56,115.04 75.69,113.17 75.69,91.69 77.72,89.66 C504.2 79.01,89.84 | 87.73,87.54 R505.1
  Top 1.27: C510.1 75.63,76.9 FL510.1
  other vias: 73.15,78.74 74.68,78.74 76.2,78.74 79.5,84.33 79.5,83.31 82.04,83.82 86.11,84.33 90.42,84.33 90.42,83.31 92.96,83.82 97.03,84.33 73.91,123.19 73.15,120.65
  pour Top (isolate 1.27, no thermals): 71.63,77.47 98.81,77.47 98.81,124.97 71.63,124.97
  pour Bottom (isolate 0.61): 71.63,77.47 98.81,77.47 98.81,124.97 71.63,124.97
DGND_S  (via drill 0.35)
  Top 0.203: U100.16 84.83,26.68 v84.58,26.92
  Top 0.508: U100.1 92.71,17.64 C100.2 94.03,16.83 C122.2 96.08,16.83 v96.52,17.27 | R130.1 v95.5,20.57 | U100.20 82.55,21.74 81.79,22.49 C104.2 80.06,22.49 C123.2 | U101.2 83.83,46.1 C120.1 85.39,45.86 C124.2 | U101.8 83.35,53.72 83.42,53.65 83.51,53.65 v83.57,53.59 | D201.2 82.15,11.94 81.9,12.19 | 81.9,12.19 82.3,12.19 | R211.1 v98.3,11.94 | C623.2 85.65,62.12 C622.2 82.36,62.12 U603.4 81.15,62.1 80.77,61.72 80.77,59.94 81.15,59.56 U603.2 U603.1 83.69,58.29 v83.82,58.42 | FL200.6 78.49,12.19 | 78.49,12.19 78.12,12.19 77.87,11.94 D200.1 | v78.23,12.45 78.49,12.19 | FL200.5 81.9,12.19
  Top 1.016: C123.2 78.3,22.79 v78.23,22.86 | C210.1 89.45,10.83 C211.1 C212.1
  Top 1.27: C510.2 75.63,75 FL510.2
  other vias: 73.41,73.41 74.93,73.41 76.45,73.41 87.12,45.97 96.52,16.26 82.3,34.8 83.31,34.8 91.44,34.8 92.46,34.8 82.8,12.45 83.82,13.72 77.22,25.15 78.23,24.13 77.22,23.62 84.07,63.5
  pour Top (isolate 1.422): 80.77,65.28 80.77,42.67 74.42,36.32 74.42,11.18 72.14,11.18 72.14,0 99.82,0 99.82,74.42 71.63,74.42 71.63,67.31 78.74,67.31
  pour Bottom (isolate 0.61): 80.77,65.28 80.77,42.67 74.42,36.32 74.42,11.18 72.14,11.18 72.14,0 99.82,0 99.82,74.42 71.63,74.42 71.63,67.31 78.74,67.31
  pour Top (isolate 0.61): 80.52,34.54 82.8,36.83 92.2,36.83 94.74,34.29 94.74,26.92 92.71,24.89 83.31,24.89 80.52,27.69
  pour Top: 95.76,16.26 96.27,15.75 97.03,15.75 97.28,16 97.28,17.53 97.03,17.78 96.77,17.78 96.27,17.78 95.76,17.27
  pour Top: 84.58,46.74 89.15,46.74 89.92,45.97 90.17,45.72 90.17,43.18 88.65,41.66 87.88,41.66 85.34,41.66 84.58,42.42
  pour Top (isolate 0.61): 80.52,12.45 81.79,12.45 83.57,14.22 85.34,14.22 85.34,12.7 84.07,12.7 82.55,11.18 80.52,11.18
DOUT
  Top 0.203: U100.17 83.05,24.14 79.25,27.94 79.25,35.05 82.3,38.1 90.93,38.1 94.23,41.4 94.23,48.01 92.2,50.04 R107.1
DOUT_OUT_ISO
  Top 0.203: U101.12 70.23,49.91 62.23,57.91 62.23,61.98 60.45,63.75 57.66,63.75 55.78,61.88 55.78,61.82 | U300.3 55.78,61.82 | 55.78,61.82 55.78,46.58 | 55.78,46.58 U301.3 | 55.78,46.58 55.78,31.34 | U302.3 55.78,31.34 | 55.78,31.34 55.78,16.1 U303.3
GND_DAC_P  (via drill 0.3, 0.35)
  Top 0.508: U504.6 53.21,83.95 v53.34,83.82 53.21,83.69 U504.3 53.21,80.22 R510.1
  Top 1.016: C508.2 56.67,75.44 57.42,76.19 57.42,77.97 56.39,78.99 R510.1 | U503.3 46.72,115.04 v45.21,113.54 45.21,103.63 | 45.21,103.63 47.24,101.6 C506.2 | 45.21,103.63 45.21,91.69 47.24,89.66 C507.2
  other vias: 51.82,83.82 49.28,84.33 49.28,83.31 55.88,84.33 55.88,83.31 57.66,86.36 56.13,86.36 47.24,91.19 47.24,88.14 41.66,78.23 43.18,78.23 44.7,78.23 48.51,116.08 48.51,114.05 44.45,114.55 45.72,114.55 67.82,123.44 67.82,119.13 67.82,121.16
  pour Bottom (isolate 1.016, rank 2): 62.74,76.71 62.74,124.97 40.64,124.97 40.64,76.71
  pour Top: 55.88,87.88 57.91,87.88 58.17,87.63 58.17,86.11 57.91,85.85 55.88,85.85 55.63,86.11 55.63,87.63
  pour Top (isolate 1.27): 53.59,85.09 54.86,85.09 55.37,85.6 55.37,86.36 55.88,86.87 58.42,86.87 58.42,76.96 58.17,76.71 56.64,76.71 56.9,76.96 56.9,77.72 56.13,78.49 53.85,78.49 53.85,79.25 52.83,80.26 52.83,82.55 49.78,82.55 45.21,77.98 40.64,77.98 40.64,94.23 49.78,85.09 52.83,85.09 52.83,87.38 53.59,87.38
  pour Top: 49.02,116.33 49.02,113.79 47.24,113.79 46.48,113.03 46.48,104.39 48.77,102.11 48.77,92.2 48.01,91.44 48.01,86.87 45.97,86.87 40.64,92.2 40.64,111.76 45.21,116.33
  pour Top: 45.72,76.45 40.64,76.45 40.64,78.23 42.93,80.52 43.43,80.52 45.72,78.23
  pour Top (no thermals): 43.69,123.95 43.69,114.55 44.45,113.79 46.23,113.79 46.23,123.95
  pour Top (no thermals): 46.23,123.95 70.36,123.95 70.36,115.06 62.48,115.06 54.61,122.94 46.23,122.94
  pour Bottom (rank 3, no thermals): 46.23,123.95 70.36,123.95 70.36,115.06 62.48,115.06 54.61,122.94 46.23,122.94
GND_DAC_S  (via drill 0.35)
  Top 1.016: C302.2 44.17,50.34 44.17,51.2 45.29,52.32 48.51,52.32 49.28,51.56 C303.2
  Bottom 1.016: C301.2 48.26,67.74 48.26,68.58 46.56,68.58 44.42,66.44 44.42,65.73 C304.2 44.22,59.46 41.15,56.39 R301.1 | C305.2 46.73,36.24 46.63,36.35 44.81,36.35 44.17,35.71 44.17,35.1 C300.2 | C306.2 44.42,20.02 44.42,20.72 44.81,21.11 46.63,21.11 46.73,21 C307.2
  other vias: 41.66,73.15 43.18,73.15 44.7,73.15
  pour Bottom (isolate 0.61): 62.48,14.73 62.48,74.42 40.64,74.42 40.64,14.73
  pour Top: 40.64,74.93 45.72,74.93 45.72,73.15 43.43,70.87 42.93,70.87 40.64,73.15
GND_ISO  (via drill 0.35)
  Top 0.406: 73.59,46.1 U101.15
  Top 0.508: L603.2 67.65,61.98 C621.2 | v72.39,54.61 72.47,54.53 U101.9
  other vias: 69.34,41.66 68.58,63.25 70.61,45.97 70.1,43.18
  pour Bottom (isolate 0.61, rank 3): 66.29,64.01 73.91,64.01 73.91,40.64 67.31,40.64 66.29,41.66
  pour Top (isolate 0.61): 66.29,64.01 73.91,64.01 73.91,40.64 67.31,40.64 66.29,41.66
LEFT_FIL
  Top 0.305: R402.2 10.33,26.42 12.37,24.38 C401.2 12.37,22.35 11.1,21.08 6.1,21.08 R403.1 4.57,26.92 6.6,28.96 U400.1
LEFT_OUT
  Top 0.305: R400.2 5.33,52.75 C313.2 9.65,59.18 10.92,60.45 11.94,60.45 12.95,61.47 | R302.1 12.95,61.47 | 12.95,61.47 13.97,60.45 15.24,60.45 15.75,59.94 U304.1
LRCK
  Top 0.203: U100.5 94.13,21.74 96.52,24.13 96.52,52.58 94.23,54.86 R108.1
LRCK_OUT_ISO
  Top 0.203: U101.14 69.72,47.37 65.28,42.93 65.28,11.18 58.67,4.57 57.15,4.57 56.13,5.59 56.13,8.13 U303.2 60.96,12.95 60.96,16.51 57.15,20.32 57.15,24.38 U302.2 60.71,27.94 60.71,32 57.15,35.56 57.15,39.62 U301.2 60.96,43.43 60.96,47.5 57.31,51.15 57.31,55.02 U300.2
N$1
  Top 0.203: R108.2 81.03,54.86 80.26,54.1 80.26,48.01 80.9,47.37 U101.3
N$2
  Top 0.508: LED200.1 96.27,13.17 97.72,14.62 R211.2
N$3
  Top 0.203: R106.2 83.95,48.64 U101.4
N$4
  Top 0.203: U101.10 70.75,52.45 R109.1
N$5
  Top 0.203: U100.13 87.23,27.08 R100.2 87.13,27.72 Y100.1 82.8,32.05 C103.1
N$6
  Top 0.203: U100.12 88.03,27.08 R100.1 88.13,28.23 Y100.2 91.95,32.05 C102.1
N$7
  Top 1.016: J600.1 13.97,117.17 U600.4
N$8
  Top 0.508: FB200.1 92.08,12.53 C212.2 C211.2 89.45,12.07 C210.2 87.76,12.19 F200.2 86.13,13.8 D202.1
N$9
  Top 0.305: U400.2 R401.1 11.94,27.69 9.14,27.69 7.37,25.91 C401.1
N$10
  Top 0.203: R107.2 83.95,49.91 U101.5
N$11
  Top 0.305: U400.6 23.37,23.37 C405.1 28.7,18.03 R405.1
N$12
  Top 0.508: U603.6 71.11,60.83 | 71.11,60.83 C620.1 69.72,61.07 L602.1 | U603.8 71.75,58.29 71.11,58.94 71.11,60.83
N$13
  Top 0.305: R401.2 R402.1 8.13,38.1 5.33,35.31 R400.1 5.33,32.51 C400.1
N$14
  Top 1.016: J600.3 23.98,117.53 U600.3
N$15
  Top 0.305: J400.1 16.26,7.62 12.95,10.92 R403.2
N$16
  Top 0.203: U100.15 85.63,26.96 84.92,27.68 R101.2
N$17
  Top 0.305: R404.1 C404.1 35.56,29.72 R406.1 R405.2
N$18
  Top 0.305: R407.2 36.83,11.43 J401.1
N$19
  Top 1.016: U500.2 85.85,116.66 85.85,118.62 83.57,120.9 J500.2
N$20
  Top 1.016: J500.1 81.03,118.36 81.03,114.3 79.27,112.54 U500.4
N$21
  Top 0.508: U501.8 91.82,87.25 92.46,87.88 93.73,87.88 94.15,88.3 R501.1 | U502.8 80.9,87.25 81.53,87.88 82.55,87.88 83.22,88.56 R504.1 | R501.1 93.38,89.66 C501.1 | R501.1 94.15,92.54 C500.1 83.22,99.73 R504.1 | R504.1 82.46,89.66 C504.1
  Top 1.016: U500.1 85.09,111.69 C500.1
N$22
  Top 0.508: L603.1 70,62.37 C620.2 71.14,62.1 U603.5 73.53,62.1 74.17,61.47 74.17,59.94 73.79,59.56 U603.7
N$23
  Top 1.016: J501.2 56.13,118.54 56.13,117.09 54.08,115.04 U503.2
N$24
  Top 0.508: U501.5 95.63,88.69 R501.2 97.19,88.9 R502.2
N$25
  Top 0.508: U502.2 U502.1 79.32,81.1 78.23,80.01 L501.2 78.75,77.47 C505.1
N$26
  Top 0.508: R505.2 86.53,88.9 R504.2 84.71,88.69 U502.5
N$27
  Top 1.016: J501.1 50.8,118.87 50.8,114.05 49.3,112.54 U503.4
N$28
  Top 0.508: U504.8 50.67,87.5 51.05,87.88 52.32,87.88 53.25,88.81 R507.1
  Top 1.016: U503.1 54.86,111.69 C506.1 53.25,99.99 R507.1 52.49,89.66 C507.1
N$30
  Top 0.508: U504.5 54.48,88.43 R507.2 55.29,89.24 R508.2
N$31
  Top 0.508: R509.1 52.07,78.99 | 52.07,78.99 R510.2 | U504.2 51.94,79.12 52.07,78.99
N$32
  Top 1.016: U600.1 16.26,103.12 19.3,100.08 29.72,100.08 32.51,97.28 C600.1 32.51,92.96 28.7,89.15 26.16,89.15 24.64,87.63 24.64,85.6 | 24.64,85.6 25.65,84.58 C602.1 | 24.64,85.6 24.64,81.72 U601.1
N$35
  Top 0.508: R601.2 R600.2 | R600.2 23.94,78.93 25.08,77.79 U601.3 | C630.1 18.8,77.98 19.75,78.93 R600.2
N$36
  Top 1.016: U600.2 21.34,108.46 19.05,110.74 12.19,110.74 5.69,104.24 C601.2 5.69,85.24 | C603.2 6.35,84.58 5.69,85.24 | U602.2 5.69,85.24
N$37  (via drill 0.35)
  other vias: 35.05,122.94 35.05,120.65
  pour Top (no thermals): 36.07,120.65 37.85,120.65 38.61,121.41 38.61,123.95 33.02,123.95 32.77,123.95 32.77,115.06 35.05,115.06 35.05,119.63
  pour Bottom (no thermals): 36.07,120.65 37.85,120.65 38.61,121.41 38.61,123.95 33.02,123.95 32.77,123.95 32.77,115.06 35.05,115.06 35.05,119.63
N$38  (via drill 0.35)
  other vias: 39.88,122.94 39.88,120.4
  pour Top (no thermals): 35.81,118.62 37.34,118.62 39.37,120.65 39.37,123.95 41.66,123.95 41.66,115.06 35.81,115.06
  pour Bottom (isolate 0.61, no thermals): 35.81,118.62 37.34,118.62 39.37,120.65 39.37,123.95 41.66,123.95 41.66,115.06 35.81,115.06
N$39
  Top 0.508: U602.3 12.32,81.35 R603.2 | R603.2 18.53,81.35 C631.2 | R602.2 R603.2
RIGHT_FIL
  Top 0.305: U400.7 25.32,26.42 C405.2 26.16,24.05 32.26,17.95 32.94,17.95 | 32.94,17.95 R406.2 | R407.1 36.58,20.32 34.21,17.95 32.94,17.95
RIGHT_OUT
  Top 0.305: C314.2 29.89,54.1 R303.1 24.38,54.1 U304.7 23.11,52.83 23.11,52.77 19.89,49.55 19.89,43.61 23.62,39.88 34.29,39.88 36.58,42.16 R404.2
USB2_N
  Top 0.406: R201.1 79.76,14.39 79.76,13.97 79.73,13.07 FL200.3
USB2_P
  Top 0.406: FL200.4 80.28,13.07 80.31,13.73 80.31,13.74 80.31,14.13 R200.1 R210.1
USB3_N
  Top 0.406: R201.2 79.55,16.82 79.76,17.02 79.76,17.81 82.08,20.14 U100.22
USB3_P
  Top 0.406: R200.2 80.77,16.76 80.52,17.02 80.52,17.78 82.3,19.56 83.23,19.56 U100.23
USB_N
  Top 0.406: J200.2 79.39,9.79 79.76,10.16 79.76,11.31 79.73,11.34 FL200.2 | FL200.2 78.73,11.57 D200.2 | FL200.2
USB_P
  Top 0.406: D201.1 81.29,11.57 FL200.1 80.31,11.54 80.31,9.45 79.01,8.15 J200.3
VBUS
  Top 0.203: 93.73,13.21 93.73,15.24 90.68,18.29 90.68,19.81 91,20.14 U100.3 93.04,20.14 R130.2
  Top 0.508: FB200.2 93.73,13.21 95.29,14.77 LED200.2
VCC_5V
  Top 0.508: J200.1 82.16,9.79 F200.1
VDD+12_FIL
  Top 0.508: U400.8 24.13,28.96 C407.1 27.69,32.51 C406.+
  Bottom 0.508: C406.+ 31.24,32.51 38.35,39.62 38.35,48.01 36.07,50.29 L600.1
VDD+12_IV
  Top 0.508: U304.8 24.64,55.63 C311.1
  Bottom 0.508: C311.1 27.69,58.67 C310.+ 30.99,58.67 32.77,60.45 L601.1
VDD-12_FIL
  Top 0.508: U400.4 14.99,21.34 C403.1 11.43,17.78 C402.- 6.35,17.78 1.27,22.86 1.27,61.47 L605.1
VDD-12_IV
  Top 0.508: U304.4 15.24,47.5 C309.1 11.94,47.5 C308.- 7.37,42.93 4.83,42.93 3.3,44.45 3.3,53.59 5.33,55.63 L606.1
VDD_3V3
  Top 0.203: U100.24 84.58,18.54 85.6,19.56 85.6,21.84 | 85.6,21.84 85.6,23.37 | U100.10 89.63,24.1 88.9,23.37 85.6,23.37 | 85.6,23.37 83.82,25.15 83.82,26.41 83.55,26.68 R101.1 | 85.6,21.84 84.69,20.94 U100.21
  Top 0.406: U100.24 82.3,17.38 R210.2
  Top 0.508: 81.03,42.42 74.93,36.32 74.93,22.61 76.64,20.89 C123.1 80.06,21.19 C104.1 81.79,20.94 U100.21 | 81.03,42.42 84.58,42.42 85.6,43.43 C124.1 84.88,43.75 C120.2 82.23,44.56 U101.1 | L500.1 88.39,70.87 90.17,69.09 90.17,58.17 88.39,56.39 80.01,56.39 78.99,55.37 78.99,44.45 81.03,42.42
VDD_3V3_1
  Top 0.508: U100.2 92.82,19.34 C100.1 94.53,18.94 C122.1 95.95,18.73 98.65,21.43 98.65,63.4 89.66,72.39 L504.1
VDD_5V_ISO
  Top 0.508: U603.3 84.06,60.83 C622.1 85.65,60.82 C623.1 86.11,60.62 87.12,61.63 87.12,65.02 78.23,73.91 L501.1
VDD_DAC
  Top 0.508: U300.5 49.53,61.47 C301.1 45.72,65.28 C304.1 | U301.5 49.53,46.23 C303.1 | U302.5 49.53,30.99 C305.1 | U303.5 49.53,15.75 C307.1
  Top 1.016: C304.1 45.72,65.55 47.5,67.32 L502.1 | C306.1 45.72,20.32 45.03,21.01 45.03,33.29 45.72,33.98 C300.1 45.72,35.81 45.03,36.5 45.03,48.38 45.72,49.07 C302.1
  Bottom 0.508: C303.1 45.72,50.04 C302.1 | C305.1 45.72,34.8 C300.1 | C307.1 45.72,19.56 C306.1
  Bottom 1.016: C304.1 C302.1
VREF
  Top 0.305: U304.5 27.69,52.33 36.63,52.33 39.37,55.07 48.01,55.07 49.28,56.34 R301.2 | U303.7 48.01,13.72 48.01,16.51 52.47,20.97 52.47,24.51 51.07,25.91 U302.7 47.75,29.21 47.75,31.75 52.32,36.32 52.32,39.88 U301.7 48.14,44.06 48.14,47.12 52.32,51.31 52.32,55.12 U300.7 R301.2 | R301.2 47.52,58.14 31.63,58.14 30.43,56.95 29,56.95 28.12,57.83 23.03,57.83 U304.3

## Text on the board
tPlace: PCM2706 4xTDA1543 / / Designed By / Kheng Choong